# Altium PCB MoveH Messkette.PcbDoc
Units mm, origin at the board's own origin, x right, y up, seen from the top; angles counter-clockwise.
Board outline 50.1 x 50 mm, 2 copper layers (Top Layer, Bottom Layer); 33 components, 29 nets, 186 pads, 4 vias.
Unrouted connection lines stored in the file: 99.
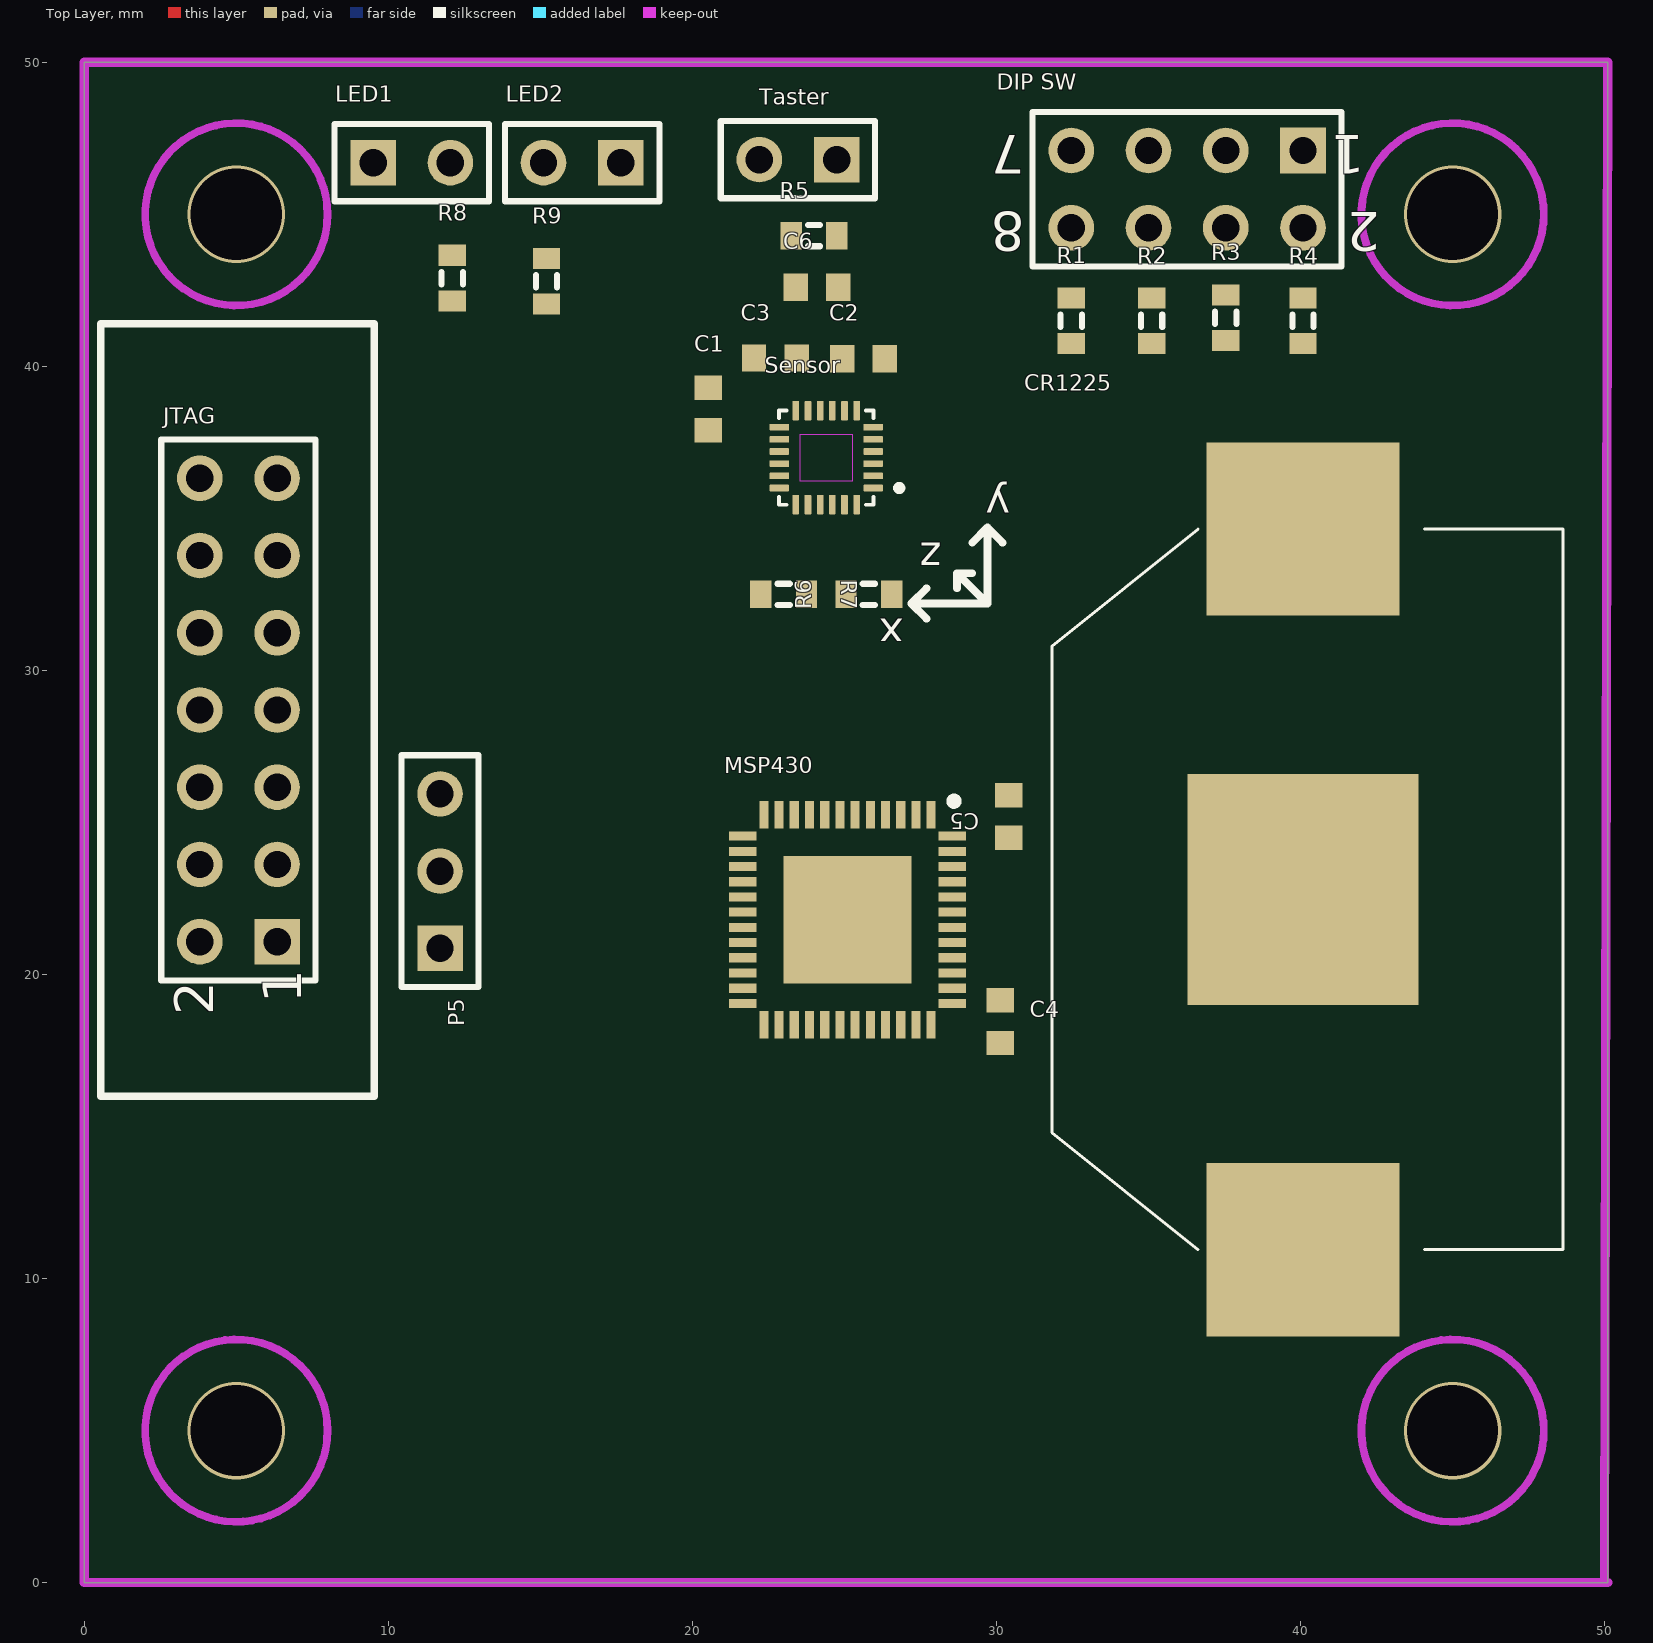
[diagram p0: Top Layer view]
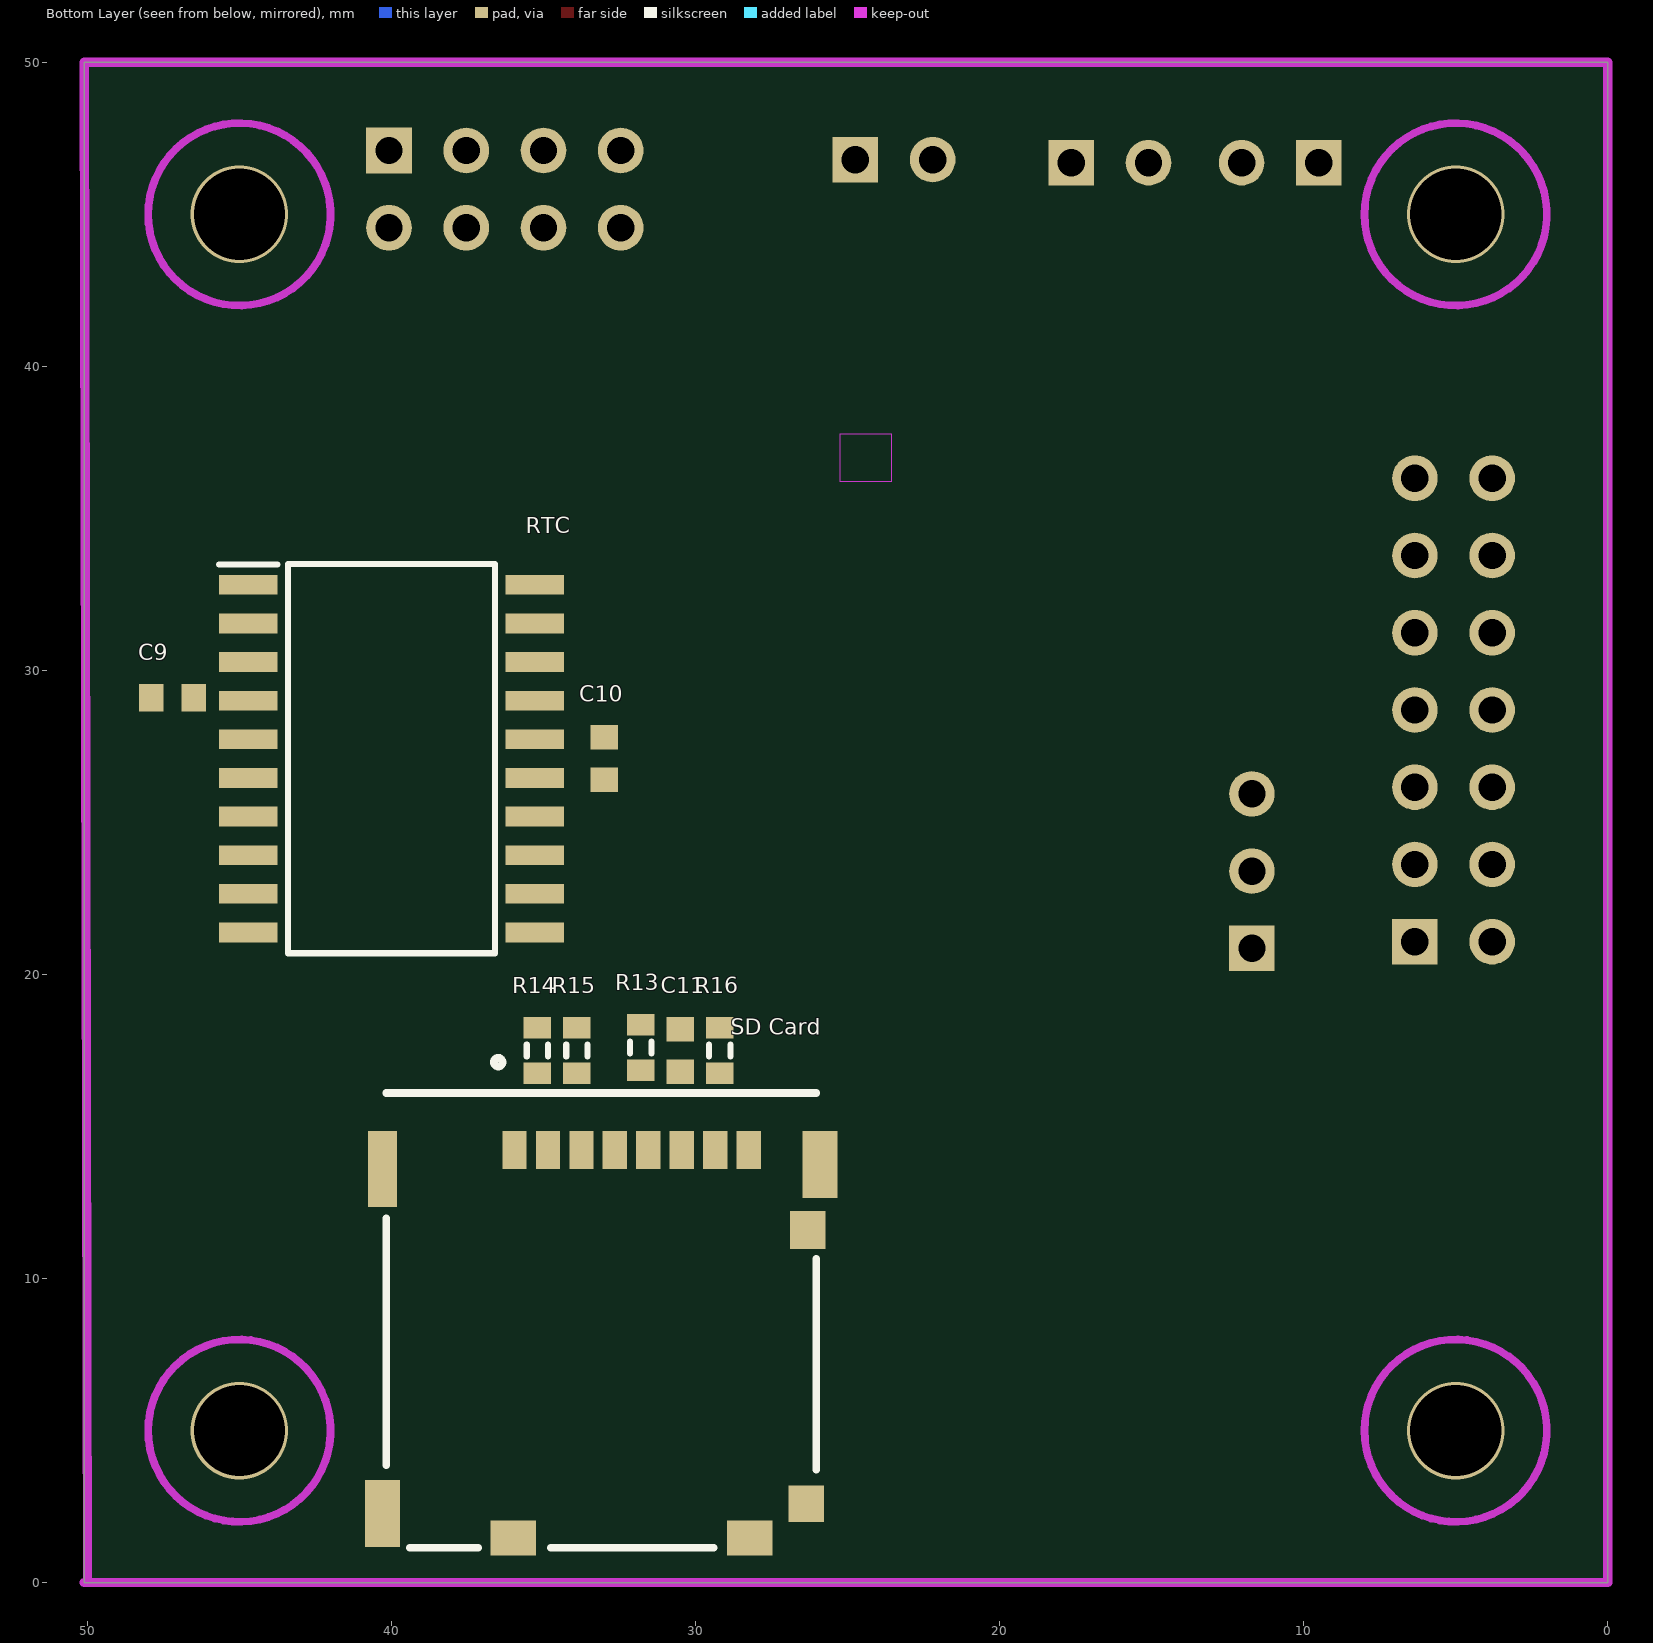
[diagram p1: Bottom Layer view, seen from below]

## Layer stack, top to bottom
Top Solder: solder mask 0.0102, Solder Resist, Dk 3.5
Top Layer: signal copper 0.0356
Dielectric 1: dielectric 0.32, FR-4, Dk 4.8
Bottom Layer: signal copper 0.0356
Bottom Solder: solder mask 0.0102, Solder Resist, Dk 3.5

## Board outline
0,0 50.1,0 50.1,50 0,50

## Design rules (kind name [scope] priority, off if disabled: settings)
Clearance [All] p1: gap=0.254 ignorepadtopadclearanceinfootprint=TRUE except(0: Arc-Hole Track-Hole SMDPad-Hole THPad-Hole Via-Hole Fill-Hole Poly-Hole Region-Hole Text-Hole)
PolygonConnect [All] p1: connectstyle=Relief reliefconductorwidth=0.254 reliefentries=4 polygonreliefangle="90 Angle" airgapwidth=0.254
RoutingVias [All] p1: holewidth=0.711 width=1.27 viastyle="Through Hole" minholewidth=0.711 minwidth=1.27 maxholewidth=0.711 maxwidth=1.27
SolderMaskExpansion [All] p1: expansion=0.102
Width [All] p1: maxlimit=0.254 minlimit=0.254 preferedwidth=0.254
30 further rules are at their usual default settings.

## Components (designator, comment, footprint, x,y, rotation, side; value= is the part's Value field where it differs from the comment)
C1 "Cap" 1608[0603] 20.524,38.6 r270 top value=100nF
C2 "Cap" 1608[0603] 25.625,40.25 r0 top value=100nF
C3 "Cap" 1608[0603] 22.725,40.275 r180 top value=100nF
C4 "Cap" 1608[0603] 30.125,18.45 r90 top value=100nF
C5 "Cap" 1608[0603] 30.4,25.2 r270 top value=100nF
C6 "Cap" 1608[0603] 24.1,42.6 r0 top value=40nF
C9 "Cap" 1608[0603] 47.2,29.1 r180 bottom value=100nF
C10 "Cap" 1608[0603] 33,27.1 r270 bottom value=100nF
C11 "Cap" 1608[0603] 30.5,17.5 r90 bottom value=100nF
CR1225 "12BH022-GR" 12BH022GR 40.08,22.8 r270 top
"DIP SW" "Header 4X2" HDR2X4 40.08,47.1 r180 top
JTAG "Header 7X2" HDR2X7 6.34,21.08 r90 top
LED1 "Header 2" HDR1X2 9.5,46.7 r0 top
LED2 "Header 2" HDR1X2 17.64,46.7 r180 top
MSP430 "MSP430FR5969IRGZR" QFN50P700X700X100-49N-D 25.1,21.8 r270 top
P5 "Header 3" HDR1X3 11.7,20.86 r90 top
R1 "Res3" J1-0603 32.46,41.5 r90 top value=5K
R2 "Res3" J1-0603 35.1,41.5 r90 top value=5K
R3 "Res3" J1-0603 37.54,41.6 r90 top value=5K
R4 "Res3" J1-0603 40.08,41.5 r90 top value=5K
R5 "Res3" J1-0603 24,44.3 r180 top value=100K
R6 "Res3" J1-0603 25.8,32.5 r180 top value=10K
R7 "Res3" J1-0603 23,32.5 r0 top value=10K
R8 "Res3" J1-0603 12.1,42.9 r270 top value=330
R9 "Res3" J1-0603 15.2,42.8 r270 top value=330
R13 "Res3" J1-0603 31.8,17.6 r90 bottom value=10K
R14 "Res3" J1-0603 35.2,17.5 r90 bottom value=10K
R15 "Res3" J1-0603 33.9,17.5 r270 bottom value=10K
R16 "Res3" J1-0603 29.2,17.5 r270 bottom value=10K
RTC "DS3234S#" SOIC127P1032X265-20N 40,27.1 r180 bottom
"SD Card" "503182-1852" 5031821852 33.1,13.6 r180 bottom
Sensor "ICM-20948" QFN40P300X300X105-24N 24.4,37 r180 top
Taster "Header 2" HDR1X2 24.74,46.8 r180 top

## Footprints (in the part's own frame and the unit in brackets; to place one, negate y for a bottom-side part, rotate by r counter-clockwise, add the part's x,y. Pads: shape width x height; smd on the part's side, far side on the other; paste and mask are expansions set on the pad)
12BH022GR [mm]
  rect 5.7x6.35 smd: 1(-11.85,0) 2(11.85,0)
  rect 7.6x7.6 smd: 3(0,0)
  silkscreen extent -11.85,-8.25 11.85,8.55, body extent -14.13,-8.25 14.13,8.55, height 4.1
1608[0603] [mm] "Chip Capacitor, Body 1.6x0.8mm, IPC High Density"
  rect 0.8x0.9 smd: 1(-0.7,0) 2(0.7,0)
  body extent -0.87,-0.48 0.87,0.48, height 1.3
5031821852 [mm]
  rect 0.8x1.24 smd: 1(-2.85,0.63) 2(-1.75,0.63) 3(-0.65,0.63) 4(0.45,0.63) 5(1.55,0.63) 6(2.65,0.63) 7(3.75,0.63) 8(4.85,0.63)
  rect 0.95x2.5 smd: 9(-7.195,0)
  rect 1.15x2.2 smd: 10(7.195,0.15) 15(-7.195,-11.33)
  rect 1.16x1.25 smd: 11(6.795,-2)
  rect 1.16x1.2 smd: 12(6.74,-11)
  rect 1.5x1.15 smd: 13(4.89,-12.125) 14(-2.89,-12.125)
  silkscreen extent -7.07,-12.45 7.07,3.66, body extent -7.47,-12.5 7.47,2.45, height 1.48
HDR1X2 [mm] "Connector; Header; 2 Position"
  rect 1.5x1.5 hole 0.9: 1(0,0)
  round 1.5 hole 0.9: 2(2.54,0)
  silkscreen extent -1.27,-1.27 3.81,1.27
HDR1X3 [mm] "Connector; Header; 3 Position"
  rect 1.5x1.5 hole 0.9: 1(0,0)
  round 1.5 hole 0.9: 2(2.54,0) 3(5.08,0)
  silkscreen extent -1.27,-1.27 6.35,1.27
HDR2X4 [mm] "Connector; Header; 4x2 Position"
  rect 1.5x1.5 hole 0.9: 1(0,0)
  round 1.5 hole 0.9: 2(0,2.54) 3(2.54,0) 4(2.54,2.54) 5(5.08,0) 6(5.08,2.54) 7(7.62,0) 8(7.62,2.54)
  silkscreen extent -1.27,-1.27 8.89,3.81
HDR2X7 [mm] "Connector; Header; 7x2 Position"
  rect 1.5x1.5 hole 0.9: 1(0,0)
  round 1.5 hole 0.9: 2(0,2.54) 3(2.54,0) 4(2.54,2.54) 5(5.08,0) 6(5.08,2.54) 7(7.62,0) 8(7.62,2.54) 9(10.16,0) 10(10.16,2.54) 11(12.7,0) 12(12.7,2.54) 13(15.24,0) 14(15.24,2.54)
  silkscreen extent -1.27,-1.27 16.51,3.81
J1-0603 [mm] "Chip Resistor, Body 1.6x0.8mm, IPC High Density"
  rect 0.7x0.9 smd: 1(-0.75,0) 2(0.75,0)
  silkscreen extent -0.2,-0.35 0.2,0.35, body extent -0.85,-0.48 0.85,0.48, height 0.9
QFN40P300X300X105-24N [mm]
  rrect25% 0.64x0.22 smd: 1(-1.545,1) 2(-1.545,0.6) 3(-1.545,0.2) 4(-1.545,-0.2) 5(-1.545,-0.6) 6(-1.545,-1) 13(1.545,-1) 14(1.545,-0.6) 15(1.545,-0.2) 16(1.545,0.2) 17(1.545,0.6) 18(1.545,1)
  rrect25% 0.22x0.64 smd: 7(-1,-1.545) 8(-0.6,-1.545) 9(-0.2,-1.545) 10(0.2,-1.545) 11(0.6,-1.545) 12(1,-1.545) 19(1,1.545) 20(0.6,1.545) 21(0.2,1.545) 22(-0.2,1.545) 23(-0.6,1.545) 24(-1,1.545)
  Keep-Out Layer region: 0.85,-0.77 -0.85,-0.77 -0.85,0.77 0.85,0.77
  Keep-Out Layer region: 0.85,-0.77 -0.85,-0.77 -0.85,0.77 0.85,0.77
  silkscreen extent -2.5,-1.55 1.55,1.55
QFN50P700X700X100-49N-D [mm]
  rect 0.9x0.3 smd: 1(-3.45,2.75) 2(-3.45,2.25) 3(-3.45,1.75) 4(-3.45,1.25) 5(-3.45,0.75) 6(-3.45,0.25) 7(-3.45,-0.25) 8(-3.45,-0.75) 9(-3.45,-1.25) 10(-3.45,-1.75) 11(-3.45,-2.25) 12(-3.45,-2.75) 25(3.45,-2.75) 26(3.45,-2.25) 27(3.45,-1.75) 28(3.45,-1.25) 29(3.45,-0.75) 30(3.45,-0.25) 31(3.45,0.25) 32(3.45,0.75) 33(3.45,1.25) 34(3.45,1.75) 35(3.45,2.25) 36(3.45,2.75)
  rect 0.3x0.9 smd: 13(-2.75,-3.45) 14(-2.25,-3.45) 15(-1.75,-3.45) 16(-1.25,-3.45) 17(-0.75,-3.45) 18(-0.25,-3.45) 19(0.25,-3.45) 20(0.75,-3.45) 21(1.25,-3.45) 22(1.75,-3.45) 23(2.25,-3.45) 24(2.75,-3.45) 37(2.75,3.45) 38(2.25,3.45) 39(1.75,3.45) 40(1.25,3.45) 41(0.75,3.45) 42(0.25,3.45) 43(-0.25,3.45) 44(-0.75,3.45) 45(-1.25,3.45) 46(-1.75,3.45) 47(-2.25,3.45) 48(-2.75,3.45)
  rect 4.2x4.2 smd: 49(0,0)
  silkscreen extent -4.02,3.38 -3.78,3.63, body extent -3.55,-3.55 3.55,3.55, height 1
SOIC127P1032X265-20N [mm]
  rect 1.925x0.65 smd: 1(-4.712,5.715) 2(-4.712,4.445) 3(-4.712,3.175) 4(-4.712,1.905) 5(-4.712,0.635) 6(-4.712,-0.635) 7(-4.712,-1.905) 8(-4.712,-3.175) 9(-4.712,-4.445) 10(-4.712,-5.715) 11(4.712,-5.715) 12(4.712,-4.445) 13(4.712,-3.175) 14(4.712,-1.905) 15(4.712,-0.635) 16(4.712,0.635) 17(4.712,1.905) 18(4.712,3.175) 19(4.712,4.445) 20(4.712,5.715)
  silkscreen extent -5.68,-6.4 3.4,6.4, body extent -5.16,-6.4 5.16,6.4, height 2.65

## Part data
C1 C2 C3 C4 C5 C6 C9 C10 C11: "Capacitor", LatestRevisionDate=17-Jul-2002, LatestRevisionNote="Re-released for DXP Platform.", PackageDescription="Radial Cap, Thru-Hole; 2 Leads; 0.3 in Pin Spacing", PackageReference=RAD-0.3, Published=8-Jun-2000, Publisher="Altium Limited"
CR1225: "Hardware", Manufacturer_Name="Eagle Plastic Devices", Datasheet Link=https://componentsearchengine.com//12BH022-GR.pdf, Height=4mm, Manufacturer_Part_Number=12BH022-GR, Mouser2 Part Number=12BH022-GR, Mouser2 Price/Stock=https://www.mouser.com/Search/Refine.aspx?Keyword=12BH022-GR
"DIP SW": "Header, 4-Pin, Dual row", LatestRevisionDate=17-Jul-2002, LatestRevisionNote="Re-released for DXP Platform.", Publisher="Altium Limited"
JTAG: "Header, 7-Pin, Dual row", LatestRevisionDate=17-Jul-2002, LatestRevisionNote="Re-released for DXP Platform.", Publisher="Altium Limited"
LED1 LED2 Taster: "Header, 2-Pin", LatestRevisionDate=17-Jul-2002, LatestRevisionNote="Re-released for DXP Platform.", Publisher="Altium Limited"
MSP430: "Integrated Circuit", Manufacturer_Name="Texas Instruments", Datasheet Link=http://www.ti.com/lit/gpn/msp430fr5969, Height=1mm, Manufacturer_Part_Number=MSP430FR5969IRGZR
P5: "Header, 3-Pin", LatestRevisionDate=17-Jul-2002, LatestRevisionNote="Re-released for DXP Platform.", Publisher="Altium Limited"
R1 R2 R3 R4 R5 R6 R7 R8 R9 R13 R14 R15 R16: "Resistor", LatestRevisionDate=29-May-2009, LatestRevisionNote="IPC-7351 Footprint Added.", PackageDescription="Chip Resistor", PackageReference=J1-0603, Published=8-Jun-2000, Publisher="Altium Limited"
RTC: "Integrated Circuit", Manufacturer_Name="Maxim Integrated", Mouser2 Part Number=700-DS3234S#, Datasheet Link=https://componentsearchengine.com//DS3234S#.pdf, Height=2.65mm, Manufacturer_Part_Number=DS3234S#, Mouser2 Price/Stock=https://www.mouser.com/Search/Refine.aspx?Keyword=700-DS3234S%23
"SD Card": "Connector", Manufacturer_Name=Molex, Mouser2 Part Number=538-503182-1852, Datasheet Link=https://componentsearchengine.com//503182-1852.pdf, Manufacturer_Part_Number=503182-1852, Mouser2 Price/Stock=https://www.mouser.com/Search/Refine.aspx?Keyword=538-503182-1852
Sensor: "Accelerometer, Gyroscope, Magnetometer, 9 Axis Sensor I²C, SPI Output", Package="TFQFN-24 TDK InvenSense", Availability=Unavailable, MF="TDK InvenSense", MP=ICM-20948, Price=None, SnapEDA_Link=https://www.snapeda.com/parts/ICM-20948/TDK%20InvenSense/view-part/4218863/?ref=snap

## Via types
v1: diameter 3.2, hole 3, Top Layer to Bottom Layer, 4 vias

## Nets (pads, with @x,y where several pads share a name; then routed paths per layer and width w, separated by ;. In a path a pad name is that pad's centre, name@x,y a point inside that pad or via, vN(x,y) a via of type N, cw(c..) or ccw(c..) an arc to the next point about the centre after c; other vN are vias at no path point)
1,8V: C2.1 Sensor.8
AVCC: "SD Card.4" C1.2 C4.2 C5.2 C9.2 C11.2 MSP430.37 MSP430.48 P5.2 R1.1 R2.1 R3.1 R4.1 R5.2 R6.1 R7.1 R13.2 R14.2 R15.1 R16.1 RTC.4 Sensor.13
GND: "DIP SW.1" "DIP SW.3" "DIP SW.5" "DIP SW.7" "SD Card.6" C1.1 C2.2 C3.2 C4.1 C5.1 C6.1 C9.1 C10.2 C11.1 CR1225.3 JTAG.9 MSP430.36 MSP430.41 MSP430.44 MSP430.47 R8.2 R9.2 RTC.7 RTC.8 RTC.9 RTC.10 RTC.11 RTC.12 RTC.13 RTC.14 RTC.15 Sensor.18 Sensor.19 Sensor.20 Taster.2
"LED1 Anode": LED1.1 MSP430.1
"LED2 Anode": LED2.1 MSP430.35
NetC3_1: C3.1 Sensor.10
NetC10_1: C10.1 CR1225.1 RTC.16
"NetDIP SW_2": "DIP SW.2" MSP430.9 R4.2
"NetDIP SW_4": "DIP SW.4" MSP430.10 R3.2
"NetDIP SW_6": "DIP SW.6" MSP430.11 R2.2
"NetDIP SW_8": "DIP SW.8" MSP430.4 R1.2
NetJTAG_11: JTAG.11 MSP430.23 RTC.6
NetLED1_2: LED1.2 R8.1
NetLED2_2: LED2.2 R9.1
NetMSP430_18: MSP430.18 RTC.1
NetMSP430_20: "SD Card.3" MSP430.20 R15.2 RTC.17
NetMSP430_21: "SD Card.7" MSP430.21 R16.2 RTC.19
NetMSP430_27: "SD Card.2" MSP430.27 R14.1
NetMSP430_31: MSP430.31 R6.2 Sensor.24
NetMSP430_32: MSP430.32 R7.2 Sensor.23
NetMSP430_40: "SD Card.5" MSP430.40 R13.1 RTC.18
"Taster Pin": C6.2 MSP430.34 R5.1 Taster.1
TCK: JTAG.7 MSP430.15
TDI: JTAG.3 MSP430.13
TDO/TDI: JTAG.1 MSP430.12
TEST: JTAG.8 MSP430.22
TMS: JTAG.5 MSP430.14
"VCC TARGET": JTAG.4 P5.3
"VCC TOOL": JTAG.2 P5.1
pads on no net: "SD Card.1" "SD Card.8" "SD Card.9" "SD Card.10" "SD Card.11" "SD Card.12" "SD Card.13" "SD Card.14" "SD Card.15" CR1225.2 JTAG.6 JTAG.10 JTAG.12 JTAG.13 JTAG.14 MSP430.2 MSP430.3 MSP430.5 MSP430.6 MSP430.7 MSP430.8 MSP430.16 MSP430.17 MSP430.19 MSP430.24 MSP430.25 MSP430.26 MSP430.28 MSP430.29 MSP430.30 MSP430.33 MSP430.38 MSP430.39 MSP430.42 MSP430.43 MSP430.45 MSP430.46 MSP430.49 RTC.2 RTC.3 RTC.5 RTC.20 Sensor.1 Sensor.2 Sensor.3 Sensor.4 Sensor.5 Sensor.6 Sensor.7 Sensor.9 Sensor.11 Sensor.12 Sensor.14 Sensor.15 Sensor.16 Sensor.17 Sensor.21 Sensor.22
copper on no net:
  other v1: 5,5 45,5 5,45 45,45

## Keep-outs
Keep-Out Layer:
  circle w0.254: c45,45 r3
  circle w0.254: c5,45 r3
  circle w0.254: c5,5 r3
  circle w0.254: c45,5 r3
  lines w0.3: 50,0 50.1,50 0,50 0,0 50.1,0

## Silkscreen, mask and mechanical layers (free items; w line width, h text height)
Top Overlay:
  lines w0.254: 27.7,31.7 27.2,32.2 ; 27.7,32.7 27.2,32.2 ; 28.7,32.7 28.7,33.2 ; 29.2,33.2 28.7,33.2 ; 29.2,34.2 29.7,34.7 ; 30.2,34.2 29.7,34.7 ; 27.2,32.2 29.7,32.2 ; 28.7,33.2 29.7,32.2 ; 29.7,32.2 29.7,33.95 29.7,34.7 ; 0.54,16 9.54,16 9.54,41.4 0.54,41.4 0.54,16
  text "y" at 30.45,35.93 h1 r180
  text "z" at 28.2,34.2 h1 r180
  text "x" at 26.95,31.7 h1 r180

## Text inside footprints (layer, text, board x,y; h text height)
"DIP SW": Top Overlay "2" at 42.62,45.068 h1.27 r180; Top Overlay "1" at 42.112,47.608 h1.27 r180; Top Overlay "7" at 30.936,47.608 h1.27 r180; Top Overlay "8" at 30.936,45.068 h1.27 r180
JTAG: Top Overlay "1" at 7.14,19.06 h1.27 r90; Top Overlay "2" at 4.24,18.66 h1.27 r90